# Altium PCB Tigershark 3D R1.3.PcbDoc (part 2 of 3)
Units mm, origin at the board's own origin, x right, y up, seen from the top; angles counter-clockwise.
Board outline 142.49 x 111.76 mm, 4 copper layers (Top Layer, Groun Plane, Power Plane, Bottom Layer); 253 components, 276 nets, 982 pads, 750 vias.
Unrouted connection lines stored in the file: 262.
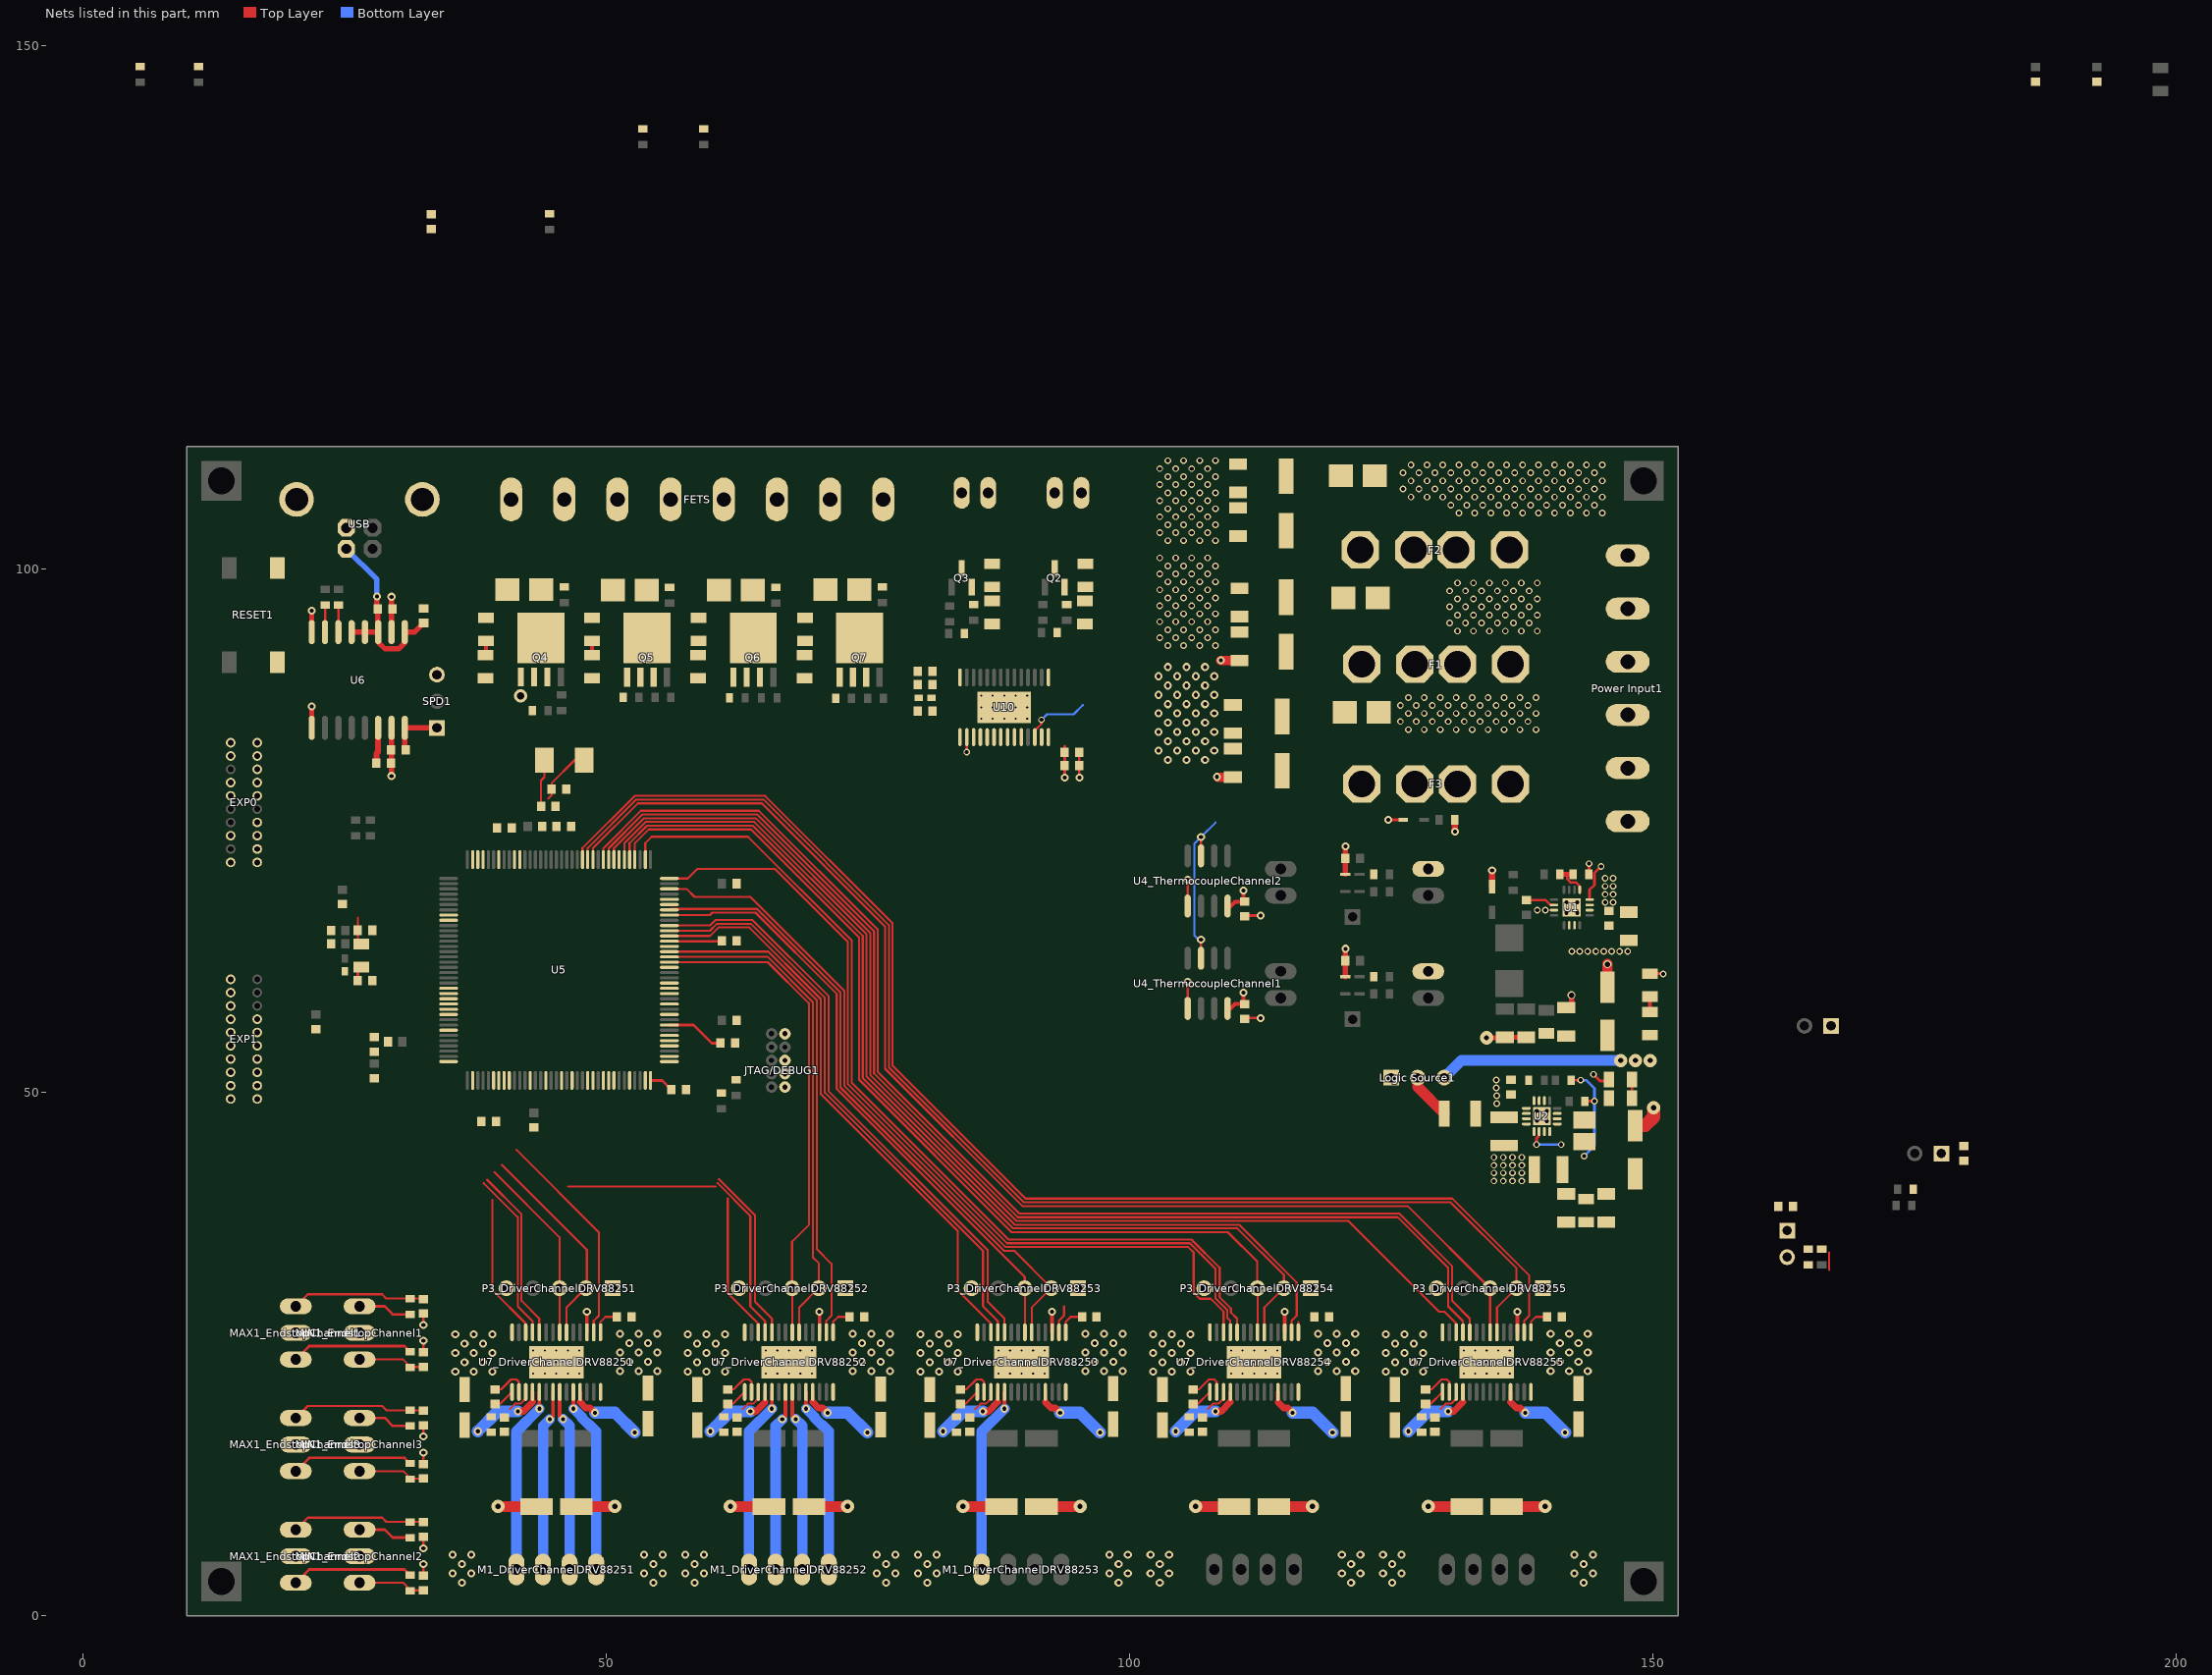
[diagram p4: the nets of this part, all layers, seen from the top]

## Via types
v1: diameter 0.635, hole 0.381, Top Layer to Bottom Layer, 336 vias
v2: diameter 0.762, hole 0.381, Top Layer to Bottom Layer, 305 vias
v3: diameter 0.5, hole 0.2, Top Layer to Bottom Layer, 90 vias
v4: diameter 1.27, hole 0.508, Top Layer to Bottom Layer, 15 vias
v5: diameter 0.762, hole 0.508, Top Layer to Bottom Layer, 3 vias
v6: diameter 1.27, hole 0.711, Top Layer to Bottom Layer, 1 vias

## Nets (pads, with @x,y where several pads share a name; then routed paths per layer and width w, separated by ;. In a path a pad name is that pad's centre, name@x,y a point inside that pad or via, vN(x,y) a via of type N, cw(c..) or ccw(c..) an arc to the next point about the centre after c; other vN are vias at no path point)
3.3VCC: 1.1 C23.1 C25.2 C26.1 C31_ThermocoupleChannel1.2 C31_ThermocoupleChannel2.2 C35.1 C45.2 C46.2 C47.2 C48.2 C49.2 C50.2 C51.2 C60.2 C61.2 C62.2 C64.2 FB3.2 FB5.1 FB9.1 JTAG/DEBUG1.1@67.056,50.546 MAX1_EndstopChannel1.3 MAX1_EndstopChannel2.3 MAX1_EndstopChannel3.3 MIN1_EndstopChannel1.3 MIN1_EndstopChannel2.3 MIN1_EndstopChannel3.3 P3_DriverChannelDRV88251.1 P3_DriverChannelDRV88252.1 P3_DriverChannelDRV88253.1 P3_DriverChannelDRV88254.1 P3_DriverChannelDRV88255.1 R2_EndstopChannel1.1 R2_EndstopChannel2.1 R2_EndstopChannel3.1 R3_EndstopChannel1.1 R3_EndstopChannel2.1 R3_EndstopChannel3.1 R11.2 R13_ThermistorChannel1.2 R13_ThermistorChannel2.2 R21.2 R24.2 R25.2 R26.2 R27.2 TRST1.1 U4_ThermocoupleChannel1.4 U4_ThermocoupleChannel2.4 U5.30 U5.43 U5.72 U5.80 U5.96 U5.134 U5.143 U7_DriverChannelDRV88251.17 U7_DriverChannelDRV88252.17 U7_DriverChannelDRV88253.17 U7_DriverChannelDRV88254.17 U7_DriverChannelDRV88255.17 U10.28 | length 82.8
  Top Layer w0.254: MAX1_EndstopChannel2.3@20.32,3.175 21.59,4.445 30.71,4.445 R2_EndstopChannel2.1@31.242,3.913 ; MAX1_EndstopChannel3.3@20.32,13.843 21.59,15.113 30.71,15.113 R2_EndstopChannel3.1@31.242,14.581 ; MAX1_EndstopChannel1.3@20.32,24.511 21.59,25.781 30.71,25.781 R2_EndstopChannel1.1@31.242,25.249 ; C64.2@26.242,60.692 FB9.1@26.242,61.686 ; MIN1_EndstopChannel2.3@26.416,8.255 28.829,8.255 29.591,7.493 R3_EndstopChannel2.1@31.242,7.493 ; MIN1_EndstopChannel3.3@26.416,18.923 28.829,18.923 29.591,18.161 R3_EndstopChannel3.1@31.242,18.161 ; MIN1_EndstopChannel1.3@26.416,29.591 28.829,29.591 29.591,28.829 R3_EndstopChannel1.1@31.242,28.829 ; U5.72@54.216,51.172 55.316,51.172 C50.2@56.196,50.292 ; U5.80@56.016,56.472 58.336,56.472 60.071,54.737 C47.2@60.895,54.737 ; U5.96@56.016,64.472 60.978,64.472 C46.2@61.022,64.516 ; v2(93.784,80.12) 93.784,83.106
  Top Layer w0.356: U7_DriverChannelDRV88251.17@48.133,27.111 v2(48.133,29.083) ; U7_DriverChannelDRV88252.17@70.358,27.111 v2(70.358,29.083) ; U7_DriverChannelDRV88253.17@92.583,27.111 v2(92.583,29.083) ; U7_DriverChannelDRV88254.17@114.808,27.111 v2(114.808,29.083) ; U7_DriverChannelDRV88255.17@137.033,27.111 v2(137.033,29.083)
  Top Layer w0.381: U4_ThermocoupleChannel1.4@109.347,58.052 109.627,58.052 110.047,58.472 110.871,58.472 v2(110.871,59.55) ; U4_ThermocoupleChannel2.4@109.347,67.831 109.627,67.831 110.047,68.251 110.871,68.251 v2(110.871,69.329)
+5VCC: "Logic Source1.3" C9.1 C34.1 FB2.2 R8.2 | length 17.5
  Bottom Layer w1.016: 130.048,51.435 131.699,53.086 v4(146.914,53.086)
  other v4: 148.311,53.086 149.708,53.086
+12VCC1: C10.2 C11.2 C16.1 C18.2 C19.2 C66_DriverChannelDRV88251.1 C66_DriverChannelDRV88252.1 C66_DriverChannelDRV88253.1 C66_DriverChannelDRV88254.1 C66_DriverChannelDRV88255.1 C69_DriverChannelDRV88251.1 C69_DriverChannelDRV88252.1 C69_DriverChannelDRV88253.1 C69_DriverChannelDRV88254.1 C69_DriverChannelDRV88255.1 C70_DriverChannelDRV88251.1 C70_DriverChannelDRV88252.1 C70_DriverChannelDRV88253.1 C70_DriverChannelDRV88254.1 C70_DriverChannelDRV88255.1 D8.2 F3.2 R30_DriverChannelDRV88251.1 R30_DriverChannelDRV88252.1 R30_DriverChannelDRV88253.1 R30_DriverChannelDRV88254.1 R30_DriverChannelDRV88255.1 U1.2 U1.3 U1.11 U7_DriverChannelDRV88251.4 U7_DriverChannelDRV88251.11 U7_DriverChannelDRV88252.4 U7_DriverChannelDRV88252.11 U7_DriverChannelDRV88253.4 U7_DriverChannelDRV88253.11 U7_DriverChannelDRV88254.4 U7_DriverChannelDRV88254.11 U7_DriverChannelDRV88255.4 U7_DriverChannelDRV88255.11 | length 73.7
  Top Layer w0.356: 42.937,20.433 U7_DriverChannelDRV88251.4@42.937,21.407 ; 47.487,20.433 U7_DriverChannelDRV88251.11@47.487,21.407 ; 65.162,20.433 U7_DriverChannelDRV88252.4@65.162,21.407 ; 69.712,20.433 U7_DriverChannelDRV88252.11@69.712,21.407 ; 87.387,20.433 U7_DriverChannelDRV88253.4@87.387,21.407 ; 91.937,20.433 U7_DriverChannelDRV88253.11@91.937,21.407 ; 109.612,20.433 U7_DriverChannelDRV88254.4@109.612,21.407 ; 114.162,20.433 U7_DriverChannelDRV88254.11@114.162,21.407 ; 131.837,20.433 U7_DriverChannelDRV88255.4@131.837,21.407 ; 136.387,20.433 U7_DriverChannelDRV88255.11@136.387,21.407
  Top Layer w0.635: v2(41.529,19.558) 42.062,19.558 42.937,20.433 ; 47.487,20.433 48.031,19.888 48.438,19.888 v2(48.895,19.431) ; v2(63.754,19.558) 64.287,19.558 65.162,20.433 ; 69.712,20.433 70.256,19.888 70.663,19.888 v2(71.12,19.431) ; v2(85.979,19.558) 86.512,19.558 87.387,20.433 ; 91.937,20.433 92.481,19.888 92.888,19.888 v2(93.345,19.431) ; v2(108.204,19.558) 108.737,19.558 109.612,20.433 ; 114.162,20.433 114.706,19.888 115.113,19.888 v2(115.57,19.431) ; v2(130.429,19.558) 130.962,19.558 131.837,20.433 ; 136.387,20.433 136.931,19.888 137.338,19.888 v2(137.795,19.431)
  Bottom Layer w1.143: v2(37.719,17.653) 39.624,19.558 v2(41.529,19.558) ; v2(48.895,19.431) 50.8,19.431 v2(52.705,17.526) ; v2(59.944,17.653) 61.849,19.558 v2(63.754,19.558) ; v2(71.12,19.431) 73.025,19.431 v2(74.93,17.526) ; v2(82.169,17.653) 84.074,19.558 v2(85.979,19.558) ; v2(93.345,19.431) 95.25,19.431 v2(97.155,17.526) ; v2(104.394,17.653) 106.299,19.558 v2(108.204,19.558) ; v2(115.57,19.431) 117.475,19.431 v2(119.38,17.526) ; v2(126.619,17.653) 128.524,19.558 v2(130.429,19.558) ; v2(137.795,19.431) 139.7,19.431 v2(141.605,17.526)
  other v1: 138.938,67.437 139.7,67.441 145.415,68.199 146.177,68.199 145.415,68.961 146.177,68.961 145.415,69.723 146.177,69.723 145.415,70.485 146.177,70.485
  other v2: 36.195,3.175 54.483,3.175 58.42,3.175 76.708,3.175 80.645,3.175 98.933,3.175 102.87,3.175 121.158,3.175 125.095,3.175 143.383,3.175 35.306,4.064 37.084,4.064 53.594,4.064 55.372,4.064 57.531,4.064 59.309,4.064 75.819,4.064 77.597,4.064 79.756,4.064 81.534,4.064 98.044,4.064 99.822,4.064 101.981,4.064 103.759,4.064 120.269,4.064 122.047,4.064 124.206,4.064 125.984,4.064 142.494,4.064 144.272,4.064 36.195,4.953 54.483,4.953 58.42,4.953 76.708,4.953 80.645,4.953 98.933,4.953 102.87,4.953 121.158,4.953 125.095,4.953 143.383,4.953 35.306,5.842 37.084,5.842 53.594,5.842 55.372,5.842 57.531,5.842 59.309,5.842 75.819,5.842 77.597,5.842 79.756,5.842 81.534,5.842 98.044,5.842 99.822,5.842 101.981,5.842 103.759,5.842 120.269,5.842 122.047,5.842 124.206,5.842 125.984,5.842 142.494,5.842 144.272,5.842 103.632,81.788 105.41,81.788 107.188,81.788 102.743,82.677 104.521,82.677 106.299,82.677 108.077,82.677 103.632,83.566 105.41,83.566 107.188,83.566 102.743,84.455 104.521,84.455 106.299,84.455 108.077,84.455 103.632,85.344 105.41,85.344 107.188,85.344 102.743,86.233 104.521,86.233 106.299,86.233 108.077,86.233 103.632,87.122 105.41,87.122 107.188,87.122 102.743,88.011 104.521,88.011 106.299,88.011 108.077,88.011 103.632,88.9 105.41,88.9 107.188,88.9 102.743,89.789 104.521,89.789 106.299,89.789 108.077,89.789 103.632,90.678 105.41,90.678 107.188,90.678
+12VCC2: C3.1 C5.2 C6.2 D4.2 D15.2 D17.2 D19.2 F2.2 FAN-1.1 FAN-2.1 FETS.3 FETS.5 FETS.7 R1.2 R13.1 R47.1 R60.2 R64.2 R68.2 U10.1 | length 1.1
  Top Layer w0.203: R1.2@131.052,76.073 R1.2@131.064,76.061
  Top Layer w0.635: v2(131.064,74.93) R1.2@131.064,76.061
  other v1: 103.632,102.743 105.156,102.743 106.68,102.743 108.204,102.743 102.87,103.505 104.394,103.505 105.918,103.505 107.442,103.505 103.632,104.267 105.156,104.267 106.68,104.267 108.204,104.267 102.87,105.029 104.394,105.029 105.918,105.029 107.442,105.029 103.632,105.791 105.156,105.791 106.68,105.791 108.204,105.791 102.87,106.553 104.394,106.553 105.918,106.553 107.442,106.553 103.632,107.315 105.156,107.315 106.68,107.315 108.204,107.315 102.87,108.102 104.394,108.102 105.918,108.102 107.442,108.102 103.632,108.864 105.156,108.864 106.68,108.864 108.204,108.864 102.87,109.626 104.394,109.626 105.918,109.626 107.442,109.626 103.632,110.388 105.156,110.388 106.68,110.388 108.204,110.388
+12VCC3: C12.1 C14.2 C15.2 D6.2 D12.2 F1.2 FETS.1 R56.2
  other v1: 103.632,92.71 105.156,92.71 106.68,92.71 108.204,92.71 102.87,93.472 104.394,93.472 105.918,93.472 107.442,93.472 103.632,94.234 105.156,94.234 106.68,94.234 108.204,94.234 102.87,94.996 104.394,94.996 105.918,94.996 107.442,94.996 103.632,95.758 105.156,95.758 106.68,95.758 108.204,95.758 102.87,96.52 104.394,96.52 105.918,96.52 107.442,96.52 103.632,97.282 105.156,97.282 106.68,97.282 108.204,97.282 102.87,98.044 104.394,98.044 105.918,98.044 107.442,98.044 103.632,98.806 105.156,98.806 106.68,98.806 108.204,98.806 102.87,99.568 104.394,99.568 105.918,99.568 107.442,99.568 103.632,100.33 105.156,100.33 106.68,100.33 108.204,100.33 102.87,101.092 104.394,101.092 105.918,101.092 107.442,101.092
ADC_TRIGGER: U5.36
ATSAM_SS: U5.64
AVREF: C65.2 FB9.2 U5.9 | length 2.7
  Top Layer w0.203: 26.242,66.742 C65.2@26.242,65.518 26.242,64.524 FB9.2@26.561,64.205
BED_PWM: U5.52 U10.17
BST: C7.2 U1.10 | length 2.8
  Top Layer w0.254: C7.2@137.922,68.391 139.743,68.391 140.193,67.941 U1.10@140.54,67.941
DIR1: P3_DriverChannelDRV88251.2 U5.78 U7_DriverChannelDRV88251.20 | length 20.2
  Top Layer w0.203: 39.998,43.112 48.133,34.976 48.133,31.394 P3_DriverChannelDRV88251.2@48.057,31.318 ; U7_DriverChannelDRV88251.20@46.187,27.107 46.187,29.487 P3_DriverChannelDRV88251.2@48.069,31.369
DIR2: P3_DriverChannelDRV88252.2 U5.93 U7_DriverChannelDRV88252.20 | length 48.1
  Top Layer w0.203: U5.93@56.016,62.972 65.425,62.972 69.723,58.674 69.723,34.285 70.282,33.726 P3_DriverChannelDRV88252.2@70.282,31.356 ; U7_DriverChannelDRV88252.20@68.412,27.107 68.412,29.487 P3_DriverChannelDRV88252.2@70.282,31.356 ; P3_DriverChannelDRV88252.2@70.282,31.318 P3_DriverChannelDRV88252.2@70.282,31.356
DIR3: P3_DriverChannelDRV88253.2 U5.102 U7_DriverChannelDRV88253.20 | length 61.9
  Top Layer w0.203: U5.102@56.016,67.472 56.108,67.564 64.389,67.564 72.365,59.588 72.365,50.516 87.981,34.9 88.963,34.9 P3_DriverChannelDRV88253.2@92.507,31.356 ; U7_DriverChannelDRV88253.20@90.637,27.107 90.637,29.487 P3_DriverChannelDRV88253.2@92.507,31.356 ; P3_DriverChannelDRV88253.2@92.507,31.318 P3_DriverChannelDRV88253.2@92.507,31.356
DIR4: P3_DriverChannelDRV88254.2 U5.113 U7_DriverChannelDRV88254.20 | length 96.8
  Top Layer w0.203: U5.113@52.216,72.272 52.216,73.847 53.883,75.514 63.973,75.514 74.498,64.989 74.498,51.4 88.865,37.033 110.292,37.033 114.732,32.593 P3_DriverChannelDRV88254.2@114.732,31.356 ; U7_DriverChannelDRV88254.20@112.862,27.107 112.862,29.487 P3_DriverChannelDRV88254.2@114.732,31.356 ; P3_DriverChannelDRV88254.2@114.732,31.318 P3_DriverChannelDRV88254.2@114.732,31.356
DIR5: P3_DriverChannelDRV88255.2 U5.121 U7_DriverChannelDRV88255.20 | length 125.2
  Top Layer w0.203: U5.121@48.216,72.272 48.216,73.367 52.852,78.003 65.004,78.003 76.987,66.02 76.987,52.431 89.896,39.522 130.663,39.522 136.957,33.228 P3_DriverChannelDRV88255.2@136.957,31.356 ; U7_DriverChannelDRV88255.20@135.087,27.107 135.087,29.487 P3_DriverChannelDRV88255.2@136.957,31.356 ; P3_DriverChannelDRV88255.2@136.957,31.318 P3_DriverChannelDRV88255.2@136.957,31.356 ; P3_DriverChannelDRV88255.2@136.969,31.369 P3_DriverChannelDRV88255.2@136.957,31.356
DIR_EXP1: EXP0.10
DIR_EXP2: EXP1.17
DM_N: R18.1 U6.6 | length 2.6
  Top Layer w0.254: U6.6@24.409,94.034 R18.1@24.409,96.608
DP_P: R20.1 U6.7 | length 2.6
  Top Layer w0.203: U6.7@23.139,94.034 R20.1@23.139,96.608
DRV_RESET1: U5.82 U7_DriverChannelDRV88251.16 | length 20.9
  Top Layer w0.203: 41.412,44.526 49.276,36.662 49.276,28.702 48.787,28.213 U7_DriverChannelDRV88251.16@48.787,27.107
DRV_RESET2: U5.94 U7_DriverChannelDRV88252.16 | length 48.5
  Top Layer w0.203: U5.94@56.016,63.472 65.464,63.472 70.104,58.832 70.104,35.052 71.501,33.655 71.501,28.702 71.012,28.213 U7_DriverChannelDRV88252.16@71.012,27.107
DRV_RESET3: U5.103 U7_DriverChannelDRV88253.16 | length 2.7
  Top Layer w0.203: U7_DriverChannelDRV88253.16@93.237,27.107 93.237,28.213 93.726,28.702 93.726,29.591
DRV_RESET4: U5.114 U7_DriverChannelDRV88254.16 | length 97.8
  Top Layer w0.203: U5.114@51.716,72.272 51.716,73.85 53.736,75.87 64.12,75.87 74.854,65.136 74.854,51.547 89.012,37.389 110.439,37.389 115.951,31.877 115.951,28.702 115.462,28.213 U7_DriverChannelDRV88254.16@115.462,27.107
DRV_RESET5: U5.122 U7_DriverChannelDRV88255.16 | length 126.2
  Top Layer w0.203: U5.122@47.716,72.272 47.716,73.37 52.705,78.359 65.151,78.359 77.343,66.167 77.343,52.578 90.043,39.878 130.81,39.878 138.176,32.512 138.176,28.702 137.687,28.213 U7_DriverChannelDRV88255.16@137.687,27.107
DRV_RESET_EXP1: EXP0.11
DRV_RESET_EXP2: EXP1.13
EN1: P3_DriverChannelDRV88251.3 U5.76 U7_DriverChannelDRV88251.21 | length 17.9
  Top Layer w0.203: 39.29,42.404 45.517,36.178 P3_DriverChannelDRV88251.3@45.517,31.318 ; U7_DriverChannelDRV88251.21@45.537,27.107 P3_DriverChannelDRV88251.3@45.537,31.318
EN2: P3_DriverChannelDRV88252.3 U5.92 U7_DriverChannelDRV88252.21 | length 47.1
  Top Layer w0.203: U5.92@56.016,62.472 65.417,62.472 69.342,58.547 69.342,37.363 67.742,35.763 P3_DriverChannelDRV88252.3@67.742,31.318 ; U7_DriverChannelDRV88252.21@67.762,27.107 P3_DriverChannelDRV88252.3@67.762,31.318
EN3: P3_DriverChannelDRV88253.3 U5.101 U7_DriverChannelDRV88253.21 | length 59.1
  Top Layer w0.203: U5.101@56.016,66.972 59.88,66.972 60.117,67.208 64.242,67.208 72.009,59.441 72.009,50.369 89.967,32.411 P3_DriverChannelDRV88253.3@89.967,31.318 ; U7_DriverChannelDRV88253.21@89.987,27.107 P3_DriverChannelDRV88253.3@89.987,31.318
EN4: P3_DriverChannelDRV88254.3 U5.112 U7_DriverChannelDRV88254.21 | length 93.4
  Top Layer w0.203: U5.112@52.716,72.272 52.716,73.844 54.031,75.159 63.825,75.159 74.143,64.841 74.143,51.252 88.717,36.678 109.372,36.678 112.192,33.858 P3_DriverChannelDRV88254.3@112.192,31.318 ; U7_DriverChannelDRV88254.21@112.212,27.107 P3_DriverChannelDRV88254.3@112.212,31.318
EN5: P3_DriverChannelDRV88255.3 U5.120 U7_DriverChannelDRV88255.21 | length 119.9
  Top Layer w0.203: U5.120@48.716,72.272 48.716,73.364 53,77.648 64.856,77.648 76.632,65.872 76.632,52.283 89.748,39.167 126.568,39.167 P3_DriverChannelDRV88255.3@134.417,31.318 ; U7_DriverChannelDRV88255.21@134.437,27.107 P3_DriverChannelDRV88255.3@134.437,31.318
EN_EXP1: EXP0.8
EN_EXP2: 
ERASE: U5.87
EXP_CS: EXP0.1 U5.45
EXP_INTERRUP1: EXP0.17
EXP_INTERRUP2: EXP0.16
EXP_SYNC: EXP0.5
FB: R7.1 R10.2 U1.5 | length 3.4
  Top Layer w0.254: 141.789,70.866 141.789,70.428 142.113,70.104 142.624,70.104 142.99,69.738 U1.5@142.99,69.391
  Top Layer w0.508: R7.1@141.212,70.866 R10.2@142.367,70.866
FET_CS: U5.49 U10.23
FET_PWM1: U5.65 U10.22
FET_PWM2: U5.63 U10.21
FET_PWM3: U5.60 U10.20
FET_PWM4: U5.57 U10.19
FET_PWM5: U5.55 U10.18
FET_RESET: U5.38 U10.27
GND: "Power Input1.2" "Power Input1.4" "Power Input1.6" C1_EndstopChannel1.2 C1_EndstopChannel2.2 C1_EndstopChannel3.2 C2_EndstopChannel1.2 C2_EndstopChannel2.2 C2_EndstopChannel3.2 C3.2 C4.2 C5.1 C6.1 C8.1 C9.2 C10.1 C11.1 C12.2 C14.1 C15.1 C16.2 C17.2 C18.1 C19.1 C20.1 C21.1 C22.2 C23.2 C24.1 C25.1 C26.2 C29.2 C30_ThermistorChannel1.1 C30_ThermistorChannel2.1 C31_ThermocoupleChannel1.1 C31_ThermocoupleChannel2.1 C32.1 C33.1 C34.2 C35.2 C36.1 C37.1 C38.1 C39.1 C40.1 C41.1 C42.1 C43.1 C44.1 C45.1 C46.1 C47.1 C48.1 C49.1 C50.1 C51.1 C52.2 C54.1 C55.1 C56.1 C57.1 C60.1 C61.1 C62.1 C63.1 C64.1 C65.1 C69_DriverChannelDRV88251.2 C69_DriverChannelDRV88252.2 C69_DriverChannelDRV88253.2 C69_DriverChannelDRV88254.2 C69_DriverChannelDRV88255.2 C70_DriverChannelDRV88251.2 C70_DriverChannelDRV88252.2 C70_DriverChannelDRV88253.2 C70_DriverChannelDRV88254.2 C70_DriverChannelDRV88255.2 C71_DriverChannelDRV88251.1 C71_DriverChannelDRV88252.1 C71_DriverChannelDRV88253.1 C71_DriverChannelDRV88254.1 C71_DriverChannelDRV88255.1 D1.1 D4.1 D5.1 D6.1 D7.1 D8.1 D9.1 D12_ThermistorChannel1.1 D12_ThermistorChannel2.1 JTAG/DEBUG1.3 JTAG/DEBUG1.5 JTAG/DEBUG1.9 MAX1_EndstopChannel1.2 MAX1_EndstopChannel2.2 MAX1_EndstopChannel3.2 MIN1_EndstopChannel1.2 MIN1_EndstopChannel2.2 MIN1_EndstopChannel3.2 P2_ThermistorChannel1.2 P2_ThermistorChannel2.2 P3_DriverChannelDRV88251.5 P3_DriverChannelDRV88252.5 P3_DriverChannelDRV88253.5 P3_DriverChannelDRV88254.5 P3_DriverChannelDRV88255.5 Q2.2 Q3.2 Q4.1 Q4.2 Q4.3 Q5.1 Q5.2 Q5.3 Q6.1 Q6.2 Q6.3 Q7.1 Q7.2 Q7.3 R10.1 R15.2 R28.1 R29.2 R32_DriverChannelDRV88251.1 R32_DriverChannelDRV88252.1 R32_DriverChannelDRV88253.1 R32_DriverChannelDRV88254.1 R32_DriverChannelDRV88255.1 R33_DriverChannelDRV88251.1 R33_DriverChannelDRV88252.1 R33_DriverChannelDRV88253.1 R33_DriverChannelDRV88254.1 R33_DriverChannelDRV88255.1 R38.1 R46.2 R55.2 R59.2 R63.2 R67.2 R71.2 RESET1.2 SPD1.3 U1.4 U1.14 U1.15 U1.17 U2.6 U2.7 U2.8 U2.15 U2.16 U2.17 U4_ThermocoupleChannel1.1 U4_ThermocoupleChannel2.1 U5.8 U5.44 U5.61 U5.95 U5.104 U5.115 U5.135 U5.138 U6.9 U6.15 U7_DriverChannelDRV88251.14 U7_DriverChannelDRV88251.28 U7_DriverChannelDRV88251.29 U7_DriverChannelDRV88252.14 U7_DriverChannelDRV88252.28 U7_DriverChannelDRV88252.29 U7_DriverChannelDRV88253.14 U7_DriverChannelDRV88253.28 U7_DriverChannelDRV88253.29 U7_DriverChannelDRV88254.14 U7_DriverChannelDRV88254.28 U7_DriverChannelDRV88254.29 U7_DriverChannelDRV88255.14 U7_DriverChannelDRV88255.28 U7_DriverChannelDRV88255.29 U10.16 U10.29 | length 90.2
  Top Layer w0.254: C1_EndstopChannel2.2@32.512,3.863 v2(32.512,4.953) ; v2(32.512,6.477) C2_EndstopChannel2.2@32.512,7.555 ; C1_EndstopChannel3.2@32.512,14.531 v2(32.512,15.621) ; v2(32.512,17.145) C2_EndstopChannel3.2@32.512,18.223 ; C1_EndstopChannel1.2@32.512,25.199 v2(32.512,26.289) ; v2(32.512,27.813) C2_EndstopChannel1.2@32.512,28.891 ; v1(84.432,82.552) U10.16@84.432,83.974 ; v2(95.184,80.12) C26.2@95.184,82.506 ; U4_ThermocoupleChannel1.1@105.537,58.052 v2(105.537,60.579) ; U4_ThermocoupleChannel2.1@105.537,67.831 v2(105.537,70.358) ; C31_ThermocoupleChannel1.1@111.063,57.137 v2(112.522,57.137) ; C31_ThermocoupleChannel2.1@111.063,66.916 v2(112.522,66.916) ; R10.1@143.891,70.878 v1(143.891,71.882) ; U1.4@143.94,68.441 143.94,69.391 144.399,69.85 144.399,70.993 v1(145.034,71.628) ; v1(144.309,51.751) 144.944,51.116 145.626,51.116 D9.1@145.791,51.281 ; D7.1@149.707,61.382 v1@150.936,61.382
  Top Layer w0.305: v2(124.702,76.073) D1.1@126.127,76.073
  Top Layer w0.508: U6.9@21.844,84.858 v2(21.844,86.919) ; v2(29.464,80.264) U6.15@29.464,84.858 ; D12_ThermistorChannel1.1@120.61,61.087 v2(120.61,63.754) ; D12_ThermistorChannel2.1@120.61,70.866 v2(120.61,73.533) ; v4(134.087,55.245) C8.1@135.792,55.245 ; C8.1@135.839,55.292 C29.2@137.897,55.292 ; C34.2@142.215,58.119 v5(142.215,59.309)
  Top Layer w0.635: D5.1@134.62,69.678 v2(134.62,71.247)
  Top Layer w0.889: v2@108.471,80.137 C19.1@109.982,80.137 ; v2(108.699,91.3) C15.1@110.477,91.3
  Top Layer w1.016: v4(39.624,10.466) R33_DriverChannelDRV88251.1@43.307,10.466 ; R32_DriverChannelDRV88251.1@47.117,10.466 v4(50.8,10.466) ; v4(61.849,10.466) R33_DriverChannelDRV88252.1@65.532,10.466 ; R32_DriverChannelDRV88252.1@69.342,10.466 v4(73.025,10.466) ; v4(84.074,10.466) R33_DriverChannelDRV88253.1@87.757,10.466 ; R32_DriverChannelDRV88253.1@91.567,10.466 v4(95.25,10.466) ; v4(106.299,10.466) R33_DriverChannelDRV88254.1@109.982,10.466 ; R32_DriverChannelDRV88254.1@113.792,10.466 v4(117.475,10.466) ; v4(128.524,10.466) R33_DriverChannelDRV88255.1@132.207,10.466 ; R32_DriverChannelDRV88255.1@136.017,10.466 v4(139.7,10.466) ; C9.2@145.644,61.087 v5(145.644,62.277)
  Top Layer w1.27: C23.2@148.311,46.863 149.246,46.863 150.07,47.687 v4(150.07,48.576)
  other v1: 134.802,41.566 135.691,41.566 136.58,41.566 137.469,41.566 134.802,42.328 135.691,42.328 136.58,42.328 137.469,42.328 134.802,43.064 135.691,43.064 136.58,43.064 137.469,43.064 134.802,43.826 135.691,43.826 136.58,43.826 137.469,43.826 139.857,47.281 138.917,47.306 138.892,48.246 139.857,48.246 135.056,48.957 135.056,49.719 135.031,50.456 135.031,51.218 150.977,61.341 142.24,63.5 143.002,63.5 143.764,63.5 144.526,63.5 145.288,63.5 146.05,63.5 146.812,63.5 147.574,63.5 141.732,67.183 142.748,67.183 141.732,68.199 142.748,68.199 126.619,84.684 128.143,84.684 129.667,84.684 131.191,84.684 132.715,84.684 134.239,84.684 135.763,84.684 137.287,84.684 138.811,84.684 125.857,85.471 127.381,85.471 128.905,85.471 130.429,85.471 131.953,85.471 133.477,85.471 135.001,85.471 136.525,85.471 138.049,85.471 126.619,86.233 128.143,86.233 129.667,86.233 131.191,86.233 132.715,86.233 134.239,86.233 135.763,86.233 137.287,86.233 138.811,86.233 125.857,86.995 127.381,86.995 128.905,86.995 130.429,86.995 131.953,86.995 133.477,86.995 135.001,86.995 136.525,86.995 138.049,86.995 126.619,87.757 128.143,87.757 129.667,87.757 131.191,87.757 132.715,87.757 134.239,87.757 135.763,87.757 137.287,87.757 138.811,87.757 131.318,94.107 132.842,94.107 134.366,94.107 135.89,94.107 137.414,94.107 138.938,94.107 130.556,94.869 132.08,94.869 133.604,94.869 135.128,94.869 136.652,94.869 138.176,94.869 131.318,95.631 132.842,95.631 134.366,95.631 135.89,95.631 137.414,95.631 138.938,95.631 130.556,96.418 132.08,96.418 133.604,96.418 135.128,96.418 136.652,96.418 138.176,96.418 131.318,97.18 132.842,97.18 134.366,97.18 135.89,97.18 137.414,97.18 138.938,97.18 130.556,97.942 132.08,97.942 133.604,97.942 135.128,97.942 136.652,97.942 138.176,97.942 131.318,98.704 132.842,98.704 134.366,98.704 135.89,98.704 137.414,98.704 138.938,98.704 131.445,105.385 132.969,105.385 134.493,105.385 136.017,105.385 137.541,105.385 139.065,105.385 139.065,105.385 140.589,105.385 142.113,105.385 143.637,105.385 145.161,105.385 130.683,106.147 132.207,106.147 133.731,106.147 135.255,106.147 136.779,106.147 138.303,106.147 139.827,106.147 141.351,106.147 142.875,106.147 144.399,106.147 126.873,106.909 128.397,106.909 129.921,106.909 131.445,106.909 132.969,106.909 134.493,106.909 136.017,106.909 137.541,106.909 139.065,106.909 139.065,106.909 140.589,106.909 142.113,106.909 143.637,106.909 145.161,106.909 126.111,107.696 127.635,107.696 129.159,107.696 130.683,107.696 132.207,107.696 133.731,107.696 135.255,107.696 136.779,107.696 138.303,107.696 139.827,107.696 141.351,107.696 142.875,107.696 144.399,107.696 126.873,108.458 128.397,108.458 129.921,108.458 131.445,108.458 132.969,108.458 134.493,108.458 136.017,108.458 137.541,108.458 139.065,108.458 139.065,108.458 140.589,108.458 142.113,108.458 143.637,108.458 145.161,108.458 126.111,109.22 127.635,109.22 129.159,109.22 130.683,109.22 132.207,109.22 133.731,109.22 135.255,109.22 136.779,109.22 138.303,109.22 139.827,109.22 141.351,109.22 142.875,109.22 144.399,109.22 126.873,109.982 128.397,109.982 129.921,109.982 131.445,109.982 132.969,109.982 134.493,109.982 136.017,109.982 137.541,109.982 139.065,109.982 139.065,109.982 140.589,109.982 142.113,109.982 143.637,109.982 145.161,109.982
  other v2: 35.56,23.368 37.338,23.368 39.116,23.368 57.785,23.368 59.563,23.368 61.341,23.368 80.01,23.368 81.788,23.368 83.566,23.368 102.235,23.368 104.013,23.368 105.791,23.368 124.46,23.368 126.238,23.368 128.016,23.368 51.309,23.415 53.087,23.415 54.865,23.415 73.534,23.415 75.312,23.415 77.09,23.415 95.759,23.415 97.537,23.415 99.315,23.415 117.984,23.415 119.762,23.415 121.54,23.415 140.209,23.415 141.987,23.415 143.765,23.415 36.449,24.257 38.227,24.257 58.674,24.257 60.452,24.257 80.899,24.257 82.677,24.257 103.124,24.257 104.902,24.257 125.349,24.257 127.127,24.257 52.198,24.304 53.976,24.304 74.423,24.304 76.201,24.304 96.648,24.304 98.426,24.304 118.873,24.304 120.651,24.304 141.098,24.304 142.876,24.304 35.56,25.146 37.338,25.146 39.116,25.146 57.785,25.146 59.563,25.146 61.341,25.146 80.01,25.146 81.788,25.146 83.566,25.146 102.235,25.146 104.013,25.146 105.791,25.146 124.46,25.146 126.238,25.146 128.016,25.146 51.309,25.193 53.087,25.193 54.865,25.193 73.534,25.193 75.312,25.193 77.09,25.193 95.759,25.193 97.537,25.193 99.315,25.193 117.984,25.193 119.762,25.193 121.54,25.193 140.209,25.193 141.987,25.193 143.765,25.193 36.449,26.035 38.227,26.035 58.674,26.035 60.452,26.035 80.899,26.035 82.677,26.035 103.124,26.035 104.902,26.035 125.349,26.035 127.127,26.035 52.198,26.082 53.976,26.082 74.423,26.082 76.201,26.082 96.648,26.082 98.426,26.082 118.873,26.082 120.651,26.082 141.098,26.082 142.876,26.082 35.56,26.924 37.338,26.924 39.116,26.924 57.785,26.924 59.563,26.924 61.341,26.924 80.01,26.924 81.788,26.924 83.566,26.924 102.235,26.924 104.013,26.924 105.791,26.924 124.46,26.924 126.238,26.924 128.016,26.924 51.309,26.971 53.087,26.971 54.865,26.971 73.534,26.971 75.312,26.971 77.09,26.971 95.759,26.971 97.537,26.971 99.315,26.971 117.984,26.971 119.762,26.971 121.54,26.971 140.209,26.971 141.987,26.971 143.765,26.971 108.331,80.175
  other v3: 43.012,23.157 44.112,23.157 45.212,23.157 46.312,23.157 47.412,23.157 65.237,23.157 66.337,23.157 67.437,23.157 68.537,23.157 69.637,23.157 87.462,23.157 88.562,23.157 89.662,23.157 90.762,23.157 91.862,23.157 109.687,23.157 110.787,23.157 111.887,23.157 112.987,23.157 114.087,23.157 131.912,23.157 133.012,23.157 134.112,23.157 135.212,23.157 136.312,23.157 43.012,24.257 44.112,24.257 45.212,24.257 46.312,24.257 47.412,24.257 65.237,24.257 66.337,24.257 67.437,24.257 68.537,24.257 69.637,24.257 87.462,24.257 88.562,24.257 89.662,24.257 90.762,24.257 91.862,24.257 109.687,24.257 110.787,24.257 111.887,24.257 112.987,24.257 114.087,24.257 131.912,24.257 133.012,24.257 134.112,24.257 135.212,24.257 136.312,24.257 43.012,25.357 44.112,25.357 45.212,25.357 46.312,25.357 47.412,25.357 65.237,25.357 66.337,25.357 67.437,25.357 68.537,25.357 69.637,25.357 87.462,25.357 88.562,25.357 89.662,25.357 90.762,25.357 91.862,25.357 109.687,25.357 110.787,25.357 111.887,25.357 112.987,25.357 114.087,25.357 131.912,25.357 133.012,25.357 134.112,25.357 135.212,25.357 136.312,25.357 85.807,85.724 86.907,85.724 88.007,85.724 89.107,85.724 90.207,85.724 85.807,86.824 86.907,86.824 88.007,86.824 89.107,86.824 90.207,86.824 85.807,87.924 86.907,87.924 88.007,87.924 89.107,87.924 90.207,87.924
  other v6: 41.783,87.911
GPIO0_EXP: EXP1.1
GPIO1_EXP: EXP1.2
GPIO2_EXP: EXP1.3
GPIO3_EXP: EXP1.4
GPIO4_EXP: EXP1.5
GPIO5_EXP: EXP1.6
GPIO6_EXP: EXP1.7
GPIO7_EXP: EXP1.8
GPIO8_EXP: EXP1.9
GPIO9_EXP: EXP1.10
GPIO10_EXP: EXP1.11
GPIO11_EXP: EXP1.12
I2C_SCL: EXP0.2 U5.77
I2C_SDA: EXP0.18 U5.91
INPUT_GND: C58.1 C59.1 U6.2 U6.8 USB.4 USB.5 USB.6 | length 5.4
  Top Layer w0.508: U6.8@21.844,94.008 v2(21.844,96.069)
  Top Layer w0.559: U6.2@29.464,94.008 v2(29.464,97.384)
KRESET: EXP0.4 kRESET.1
MAX_ES1: C2_EndstopChannel1.1 MAX1_EndstopChannel1.1 R3_EndstopChannel1.2 U5.22 | length 12.8
  Top Layer w0.203: MAX1_EndstopChannel1.1@20.32,29.591 21.463,30.734 28.575,30.734 28.98,30.329 R3_EndstopChannel1.2@31.242,30.329 32.474,30.329 C2_EndstopChannel1.1@32.512,30.291
MAX_ES2: C2_EndstopChannel2.1 MAX1_EndstopChannel2.1 R3_EndstopChannel2.2 U5.26 | length 12.8
  Top Layer w0.203: MAX1_EndstopChannel2.1@20.32,8.255 21.463,9.398 28.575,9.398 28.98,8.993 R3_EndstopChannel2.2@31.242,8.993 32.474,8.993 C2_EndstopChannel2.1@32.512,8.955
MAX_ES3: C2_EndstopChannel3.1 MAX1_EndstopChannel3.1 R3_EndstopChannel3.2 U5.24 | length 12.8
  Top Layer w0.203: MAX1_EndstopChannel3.1@20.32,18.923 21.463,20.066 28.575,20.066 28.98,19.661 R3_EndstopChannel3.2@31.242,19.661 32.474,19.661 C2_EndstopChannel3.1@32.512,19.623
MIN_ES1: C1_EndstopChannel1.1 MIN1_EndstopChannel1.1 R2_EndstopChannel1.2 U5.23 | length 6.4
  Top Layer w0.203: MIN1_EndstopChannel1.1@26.416,24.511 30.58,24.511 31.292,23.799 C1_EndstopChannel1.1@32.512,23.799
MIN_ES2: C1_EndstopChannel2.1 MIN1_EndstopChannel2.1 R2_EndstopChannel2.2 U5.27 | length 6.4
  Top Layer w0.203: MIN1_EndstopChannel2.1@26.416,3.175 30.58,3.175 31.292,2.463 C1_EndstopChannel2.1@32.512,2.463
MIN_ES3: C1_EndstopChannel3.1 MIN1_EndstopChannel3.1 R2_EndstopChannel3.2 U5.25 | length 6.4
  Top Layer w0.203: MIN1_EndstopChannel3.1@26.416,13.843 30.58,13.843 31.292,13.131 C1_EndstopChannel3.1@32.512,13.131
MISO: U4_ThermocoupleChannel1.7 U4_ThermocoupleChannel2.7 U5.68 U10.26 | length 21.8
  Top Layer w0.203: U10.26@90.932,84.609 91.567,85.244 v1(91.567,85.625) ; U4_ThermocoupleChannel1.7@106.807,62.852 v2(106.807,64.643) ; U4_ThermocoupleChannel2.7@106.807,72.631 v2(106.807,74.422)
  Bottom Layer w0.203: v1(91.567,85.625) 92.096,86.154 94.636,86.154 95.504,87.022 ; v2(106.807,64.643) 106.553,64.643 106.172,65.024 106.172,73.787 v2(106.807,74.422) 108.204,75.819
MOD0E1: U5.74 U7_DriverChannelDRV88251.24 | length 16.7
  Top Layer w0.203: 38.583,41.697 41.885,38.396 41.885,30.124 43.587,28.422 U7_DriverChannelDRV88251.24@43.587,27.107
MOD0E2: U5.88 U7_DriverChannelDRV88252.24 | length 16.7
  Top Layer w0.203: 60.757,41.732 64.198,38.291 64.198,30.036 65.812,28.422 U7_DriverChannelDRV88252.24@65.812,27.107
MOD0E3: U5.99 U7_DriverChannelDRV88253.24 | length 57.5
  Top Layer w0.203: U5.99@56.016,65.972 59.886,65.972 60.411,66.497 63.947,66.497 71.247,59.197 71.247,50.125 86.423,34.949 86.423,30.036 88.037,28.422 U7_DriverChannelDRV88253.24@88.037,27.107
MOD0E4: U5.110 U7_DriverChannelDRV88254.24 | length 88.6
  Top Layer w0.203: U5.110@53.716,72.272 53.716,73.838 54.325,74.447 63.531,74.447 73.431,64.547 73.431,50.958 88.423,35.966 105.898,35.966 108.585,33.279 108.585,30.47 109.673,29.382 109.673,29.011 110.262,28.422 U7_DriverChannelDRV88254.24@110.262,27.107
MOD0E5: U5.118 U7_DriverChannelDRV88255.24 | length 116.6
  Top Layer w0.203: U5.118@49.716,72.272 49.716,73.358 53.294,76.937 64.562,76.937 75.921,65.578 75.921,51.989 89.454,38.456 125.755,38.456 130.81,33.401 130.81,30.099 132.487,28.422 U7_DriverChannelDRV88255.24@132.487,27.107
MOD1E1: U5.73 U7_DriverChannelDRV88251.25 | length 16.2
  Top Layer w0.203: 38.285,41.344 41.529,38.1 41.529,29.591 42.937,28.183 U7_DriverChannelDRV88251.25@42.937,27.107
MOD1E2: U5.86 U7_DriverChannelDRV88252.25 | length 16.2
  Top Layer w0.203: 60.604,41.377 63.754,38.227 63.754,29.591 65.162,28.183 U7_DriverChannelDRV88252.25@65.162,27.107
MOD1E3: U5.98 U7_DriverChannelDRV88253.25 | length 56.9
  Top Layer w0.203: U5.98@56.016,65.472 59.889,65.472 60.559,66.142 63.8,66.142 70.866,59.075 70.866,50.003 85.979,34.89 85.979,29.591 87.387,28.183 U7_DriverChannelDRV88253.25@87.387,27.107
MOD1E4: U5.108 U7_DriverChannelDRV88254.25 | length 83
  Top Layer w0.203: U5.108@56.016,70.472 57.772,70.472 58.674,71.374 66.101,71.374 73.076,64.399 73.076,50.81 88.275,35.611 105.75,35.611 108.204,33.157 108.204,30.348 109.318,29.234 109.318,28.477 109.612,28.183 U7_DriverChannelDRV88254.25@109.612,27.107
MOD1E5: U5.117 U7_DriverChannelDRV88255.25 | length 115.3
  Top Layer w0.203: U5.117@50.216,72.272 50.216,73.356 53.441,76.581 64.415,76.581 75.565,65.431 75.565,51.842 89.307,38.1 125.608,38.1 130.429,33.279 130.429,29.591 131.837,28.183 U7_DriverChannelDRV88255.25@131.837,27.107
MOD2E1: U5.71 U7_DriverChannelDRV88251.26 | length 13.1
  Top Layer w0.203: 39.116,39.751 39.116,31.115 U7_DriverChannelDRV88251.26@42.287,27.944
MOD2E2: U5.84 U7_DriverChannelDRV88252.26 | length 27.3
  Top Layer w0.203: 46.331,41.021 60.452,41.021 ; 61.595,39.878 61.595,30.861 U7_DriverChannelDRV88252.26@64.512,27.944
MOD2E3: U5.97 U7_DriverChannelDRV88253.26 | length 55.4
  Top Layer w0.203: U5.97@56.016,64.972 59.892,64.972 60.706,65.786 63.653,65.786 70.485,58.954 70.485,49.881 83.566,36.8 83.566,31.115 U7_DriverChannelDRV88253.26@86.737,27.944
MOD2E4: U5.106 U7_DriverChannelDRV88254.26 | length 80
  Top Layer w0.203: U5.106@56.016,69.472 57.655,69.472 58.42,68.707 63.754,68.707 72.72,59.741 72.72,50.663 88.128,35.255 105.603,35.255 106.108,34.751 106.108,30.902 106.696,30.314 107.735,30.314 108.962,29.087 U7_DriverChannelDRV88254.26@108.962,27.944 ; 166.82,33.085 166.82,34.74
MOD2E5: U5.116 U7_DriverChannelDRV88255.26 | length 110.7
  Top Layer w0.203: U5.116@50.716,72.272 50.716,73.353 53.589,76.225 64.267,76.225 75.209,65.283 75.209,51.694 89.159,37.744 120.879,37.744 129.54,29.083 130.048,29.083 U7_DriverChannelDRV88255.26@131.187,27.944
MODE0_EXP1: EXP0.14
MODE0_EXP2: EXP1.16
MODE1_EXP1: EXP0.13
MODE1_EXP2: EXP1.15
MODE2_EXP1: EXP0.12
MODE2_EXP2: EXP1.14
MOSI: U5.42 U10.24
Net1_2: 1.2 R22.2 R29.1
NetC4_1: C4.1 C52.1 FB3.1 L2.2 R12.2 R37.2 U2.14 | length 14.1
  Top Layer w0.254: v1(138.866,45.046) 138.866,45.652 139.124,45.91 U2.14@139.124,46.288 ; R37.2@142.156,51.192 v1(143.083,51.192) ; R12.2@143.477,49.186 v1(144.404,49.186)
  Bottom Layer w0.254: v1(138.866,45.046) v1(141.229,45.046) ; v1(143.083,51.192) 143.616,51.192 144.404,50.405 v1(144.404,49.186) 144.404,44.944 v1(143.413,43.953)
NetC17_1: C17.1 C20.2 FB1.1 U10.14
NetC21_2: C21.2 FB1.2 U10.15
NetC22_1: C22.1 F4.1 U2.10 U2.11 U2.12 U2.13
NetC24_2: C24.2 U2.9
NetC43_2: C43.2 U5.141 X2.1 | length 5.6
  Top Layer w0.203: 44.45,78.105 44.766,78.421 C43.2@44.766,78.994 44.766,79.564 46.99,81.788 X2.1@47.879,81.788
NetC44_2: C44.2 U5.142 X2.2 | length 4.6
  Top Layer w0.203: C44.2@43.75,77.343 43.75,79.818 44.079,80.147 X2.2@44.079,81.788
NetC56_2: "Logic Source1.1" C56.2 U6.14 | length 3.4
  Top Layer w0.559: C56.2@28.027,81.483 28.027,82.383 28.194,82.55 U6.14@28.194,84.858
NetC57_2: C57.2 R16.2 SPD1.1 U6.16 | length 5.2
  Top Layer w0.254: C57.2@30.734,82.844 C57.2@30.824,82.753
  Top Layer w0.508: C57.2@30.734,82.844 U6.16@30.734,84.858 SPD1.1@33.804,84.858
NetC58_2: C58.2 C59.2 U6.1 U6.3 U6.4 U6.5 USB.1 | length 18.8
  Top Layer w0.508: U6.5@25.654,94.008 U6.4@26.924,94.008 U6.3@28.194,94.008 ; C58.2@28.067,96.303 v2(28.067,97.409) ; C58.2@28.154,96.215 28.154,94.048 U6.3@28.194,94.008 ; C59.2@32.537,94.88 31.666,94.008 U6.1@30.734,94.008 30.734,93.015 30.124,92.405 28.854,92.405 28.194,93.066 U6.3@28.194,94.008
  Bottom Layer w0.508: USB.1@25.146,101.956 28.067,99.035 v2(28.067,97.409)
NetC66_DriverChannelDRV88251_2: C66_DriverChannelDRV88251.2 R30_DriverChannelDRV88251.2 U7_DriverChannelDRV88251.3 | length 2.6
  Top Layer w0.203: 40.767,19.772 41.289,20.295 41.806,20.295 42.287,20.775 U7_DriverChannelDRV88251.3@42.287,21.407
NetC66_DriverChannelDRV88252_2: C66_DriverChannelDRV88252.2 R30_DriverChannelDRV88252.2 U7_DriverChannelDRV88252.3 | length 2.6
  Top Layer w0.203: 62.992,19.772 63.514,20.295 64.031,20.295 64.512,20.775 U7_DriverChannelDRV88252.3@64.512,21.407
NetC66_DriverChannelDRV88253_2: C66_DriverChannelDRV88253.2 R30_DriverChannelDRV88253.2 U7_DriverChannelDRV88253.3 | length 2.6
  Top Layer w0.203: 85.217,19.772 85.739,20.295 86.256,20.295 86.737,20.775 U7_DriverChannelDRV88253.3@86.737,21.407
NetC66_DriverChannelDRV88254_2: C66_DriverChannelDRV88254.2 R30_DriverChannelDRV88254.2 U7_DriverChannelDRV88254.3 | length 2.6
  Top Layer w0.203: 107.442,19.772 107.964,20.295 108.481,20.295 108.962,20.775 U7_DriverChannelDRV88254.3@108.962,21.407
NetC66_DriverChannelDRV88255_2: C66_DriverChannelDRV88255.2 R30_DriverChannelDRV88255.2 U7_DriverChannelDRV88255.3 | length 2.6
  Top Layer w0.203: 129.667,19.772 130.189,20.295 130.706,20.295 131.187,20.775 U7_DriverChannelDRV88255.3@131.187,21.407
NetC68_DriverChannelDRV88251_1: C68_DriverChannelDRV88251.1 U7_DriverChannelDRV88251.1 | length 2.1
  Top Layer w0.203: C68_DriverChannelDRV88251.1@39.37,20.255 39.835,20.255 U7_DriverChannelDRV88251.1@40.987,21.407
NetC68_DriverChannelDRV88251_2: C68_DriverChannelDRV88251.2 U7_DriverChannelDRV88251.2 | length 3.7
  Top Layer w0.203: C68_DriverChannelDRV88251.2@39.37,21.655 39.943,21.655 40.894,22.606 41.402,22.606 41.637,22.371 U7_DriverChannelDRV88251.2@41.637,21.407
NetC68_DriverChannelDRV88252_1: C68_DriverChannelDRV88252.1 U7_DriverChannelDRV88252.1 | length 2.1
  Top Layer w0.203: C68_DriverChannelDRV88252.1@61.595,20.255 62.06,20.255 U7_DriverChannelDRV88252.1@63.212,21.407
NetC68_DriverChannelDRV88252_2: C68_DriverChannelDRV88252.2 U7_DriverChannelDRV88252.2 | length 3.7
  Top Layer w0.203: C68_DriverChannelDRV88252.2@61.595,21.655 62.168,21.655 63.119,22.606 63.627,22.606 63.862,22.371 U7_DriverChannelDRV88252.2@63.862,21.407
NetC68_DriverChannelDRV88253_1: C68_DriverChannelDRV88253.1 U7_DriverChannelDRV88253.1 | length 2.1
  Top Layer w0.203: C68_DriverChannelDRV88253.1@83.82,20.255 84.285,20.255 U7_DriverChannelDRV88253.1@85.437,21.407
NetC68_DriverChannelDRV88253_2: C68_DriverChannelDRV88253.2 U7_DriverChannelDRV88253.2 | length 3.7
  Top Layer w0.203: C68_DriverChannelDRV88253.2@83.82,21.655 84.393,21.655 85.344,22.606 85.852,22.606 86.087,22.371 U7_DriverChannelDRV88253.2@86.087,21.407
NetC68_DriverChannelDRV88254_1: C68_DriverChannelDRV88254.1 U7_DriverChannelDRV88254.1 | length 2.1
  Top Layer w0.203: C68_DriverChannelDRV88254.1@106.045,20.255 106.51,20.255 U7_DriverChannelDRV88254.1@107.662,21.407
NetC68_DriverChannelDRV88254_2: C68_DriverChannelDRV88254.2 U7_DriverChannelDRV88254.2 | length 3.7
  Top Layer w0.203: C68_DriverChannelDRV88254.2@106.045,21.655 106.618,21.655 107.569,22.606 108.077,22.606 108.312,22.371 U7_DriverChannelDRV88254.2@108.312,21.407
NetC68_DriverChannelDRV88255_1: C68_DriverChannelDRV88255.1 U7_DriverChannelDRV88255.1 | length 2.1
  Top Layer w0.203: C68_DriverChannelDRV88255.1@128.27,20.255 128.735,20.255 U7_DriverChannelDRV88255.1@129.887,21.407
NetC68_DriverChannelDRV88255_2: C68_DriverChannelDRV88255.2 U7_DriverChannelDRV88255.2 | length 3.7
  Top Layer w0.203: C68_DriverChannelDRV88255.2@128.27,21.655 128.843,21.655 129.794,22.606 130.302,22.606 130.537,22.371 U7_DriverChannelDRV88255.2@130.537,21.407
NetC71_DriverChannelDRV88251_2: C71_DriverChannelDRV88251.2 U7_DriverChannelDRV88251.15 | length 2.7
  Top Layer w0.203: U7_DriverChannelDRV88251.15@49.437,27.107 49.437,28.101 49.911,28.575 C71_DriverChannelDRV88251.2@50.989,28.575
NetC71_DriverChannelDRV88252_2: C71_DriverChannelDRV88252.2 U7_DriverChannelDRV88252.15 | length 2.7
  Top Layer w0.203: U7_DriverChannelDRV88252.15@71.662,27.107 71.662,28.101 72.136,28.575 C71_DriverChannelDRV88252.2@73.214,28.575
NetC71_DriverChannelDRV88253_2: C71_DriverChannelDRV88253.2 U7_DriverChannelDRV88253.15 | length 2.7
  Top Layer w0.203: U7_DriverChannelDRV88253.15@93.887,27.107 93.887,28.101 94.361,28.575 C71_DriverChannelDRV88253.2@95.439,28.575
NetC71_DriverChannelDRV88254_2: C71_DriverChannelDRV88254.2 U7_DriverChannelDRV88254.15 | length 1
  Top Layer w0.203: U7_DriverChannelDRV88254.15@116.112,27.107 116.112,28.101
NetC71_DriverChannelDRV88255_2: C71_DriverChannelDRV88255.2 U7_DriverChannelDRV88255.15 | length 2.7
  Top Layer w0.203: U7_DriverChannelDRV88255.15@138.337,27.107 138.337,28.101 138.811,28.575 C71_DriverChannelDRV88255.2@139.889,28.575
NetD7_2: D7.2 R8.1 | length 1.5
  Top Layer w0.381: R8.1@149.708,57.697 D7.2@149.707,59.182
NetD9_2: D9.2 R11.1 | length 1.8
  Top Layer w0.254: D9.2@147.991,51.281 147.993,51.279 R11.1@147.993,49.491
NetD10_1: D10.1 FAN-1.2 Q2.3 R14.2
NetD10_2: D10.2 R13.2
NetD11_1: D11.1 FAN-2.2 Q3.3
NetD11_2: D11.2 R47.2 R48.2
NetD12_1: D12.1 D13.1 FETS.2 Q4.5 R57.2
NetD13_2: D13.2 R56.1 | length 1.4
  Top Layer w0.203: D13.2@38.443,91.803 D13.2@38.481,91.841
  Top Layer w0.381: D13.2@38.481,91.841 R56.1@38.481,93.161
NetD14_1: D14.1 D15.1 FETS.4 Q5.5 R61.2
NetD14_2: D14.2 R60.1 | length 1.3
  Top Layer w0.381: D14.2@48.641,91.841 R60.1@48.641,93.161
NetD16_1: D16.1 D17.1 FETS.6 Q6.5 R65.2
NetD16_2: D16.2 R64.1
NetD18_1: D18.1 D19.1 FETS.8 Q7.5 R69.2
NetD18_2: D18.2 R68.1
NetEXP0_9: 
NetEXP0_10: 
NetEXP0_11: 
NetEXP0_12: 
NetEXP0_13: 
NetEXP0_14: 
NetEXP0_15: 
NetEXP0_16: 
NetEXP0_17: 
NetEXP0_18: 
NetEXP0_19: 
NetEXP0_20: 
NetEXP0_21: 
NetEXP0_22: 
NetEXP0_23: 
NetEXP0_24: 
NetEXP0_25: 
NetEXP0_26: 
NetEXP0_27: 
NetEXP0_28: 
NetEXP0_29: 
NetEXP0_30: 
NetEXP0_31: 
NetEXP0_32: 
NetEXP0_33: 
NetEXP0_34: 
NetEXP0_35: 
NetEXP0_36: 
NetEXP0_37: 
NetEXP0_38: 
NetEXP0_39: 
NetEXP0_40: 
NetF1_1: "Power Input1.3" F1.1
NetF2_1: "Power Input1.1" F2.1
NetF3_1: "Power Input1.5" F3.1
NetF4_2: "Logic Source1.2" F4.2 | length 4.5
  Top Layer w1.016: 127.508,51.435 127.508,50.545 F4.2@130.047,48.006
NetL2_1: L2.1 U2.1 U2.2 U2.3
NetM1_DriverChannelDRV88251_1: M1_DriverChannelDRV88251.1 U7_DriverChannelDRV88251.5 | length 17.9
  Top Layer w0.356: v2(43.587,19.812) U7_DriverChannelDRV88251.5@43.587,21.407
  Bottom Layer w0.991: M1_DriverChannelDRV88251.1@41.402,4.445 41.402,17.627 v2(43.587,19.812)
NetM1_DriverChannelDRV88251_2: M1_DriverChannelDRV88251.2 U7_DriverChannelDRV88251.7 | length 17.4
  Top Layer w0.356: v2(44.577,18.796) 44.887,19.106 U7_DriverChannelDRV88251.7@44.887,21.407
  Bottom Layer w0.991: M1_DriverChannelDRV88251.2@43.942,4.445 43.942,18.161 v2(44.577,18.796)
NetM1_DriverChannelDRV88251_3: M1_DriverChannelDRV88251.3 U7_DriverChannelDRV88251.8 | length 16.9
  Top Layer w0.356: 45.537,19.132 U7_DriverChannelDRV88251.8@45.537,21.407
  Bottom Layer w0.991: v2(45.847,18.822) 46.482,18.187 M1_DriverChannelDRV88251.3@46.482,4.445
NetM1_DriverChannelDRV88251_4: M1_DriverChannelDRV88251.4 U7_DriverChannelDRV88251.10 | length 17.8
  Top Layer w0.356: v2@46.837,19.888 U7_DriverChannelDRV88251.10@46.837,21.407
  Bottom Layer w0.991: v2(46.863,19.812) 47.676,18.999 47.676,18.926 48.39,18.212 48.463,18.212 49.022,17.653 M1_DriverChannelDRV88251.4@49.022,4.445
NetM1_DriverChannelDRV88252_1: M1_DriverChannelDRV88252.1 U7_DriverChannelDRV88252.5 | length 17.9
  Top Layer w0.356: v2(65.812,19.812) U7_DriverChannelDRV88252.5@65.812,21.407
  Bottom Layer w0.991: M1_DriverChannelDRV88252.1@63.627,4.445 63.627,17.627 v2(65.812,19.812)
NetM1_DriverChannelDRV88252_2: M1_DriverChannelDRV88252.2 U7_DriverChannelDRV88252.7 | length 17.4
  Top Layer w0.356: v2(66.802,18.796) 67.112,19.106 U7_DriverChannelDRV88252.7@67.112,21.407
  Bottom Layer w0.991: M1_DriverChannelDRV88252.2@66.167,4.445 66.167,18.161 v2(66.802,18.796)
NetM1_DriverChannelDRV88252_3: M1_DriverChannelDRV88252.3 U7_DriverChannelDRV88252.8 | length 16.9
  Top Layer w0.356: 67.762,19.132 U7_DriverChannelDRV88252.8@67.762,21.407
  Bottom Layer w0.991: v2(68.072,18.822) 68.707,18.187 M1_DriverChannelDRV88252.3@68.707,4.445
NetM1_DriverChannelDRV88252_4: M1_DriverChannelDRV88252.4 U7_DriverChannelDRV88252.10 | length 17.8
  Top Layer w0.356: v2@69.062,19.888 U7_DriverChannelDRV88252.10@69.062,21.407
  Bottom Layer w0.991: v2(69.088,19.812) 69.901,18.999 69.901,18.926 70.615,18.212 70.688,18.212 71.247,17.653 M1_DriverChannelDRV88252.4@71.247,4.445
NetM1_DriverChannelDRV88253_1: M1_DriverChannelDRV88253.1 U7_DriverChannelDRV88253.5 | length 17.9
  Top Layer w0.356: v2(88.037,19.812) U7_DriverChannelDRV88253.5@88.037,21.407
  Bottom Layer w0.991: M1_DriverChannelDRV88253.1@85.852,4.445 85.852,17.627 v2(88.037,19.812)